# Altium PCB LQ_MOSFET光隔全桥双路驱动.PcbDoc
Units mil, origin at the board's own origin, x right, y up, seen from the top; angles counter-clockwise.
Board outline 2086.61 x 3267.72 mil, 2 copper layers (TopLayer, BottomLayer); 69 components, 48 nets, 195 pads, 0 vias.
Unrouted connection lines stored in the file: 19.
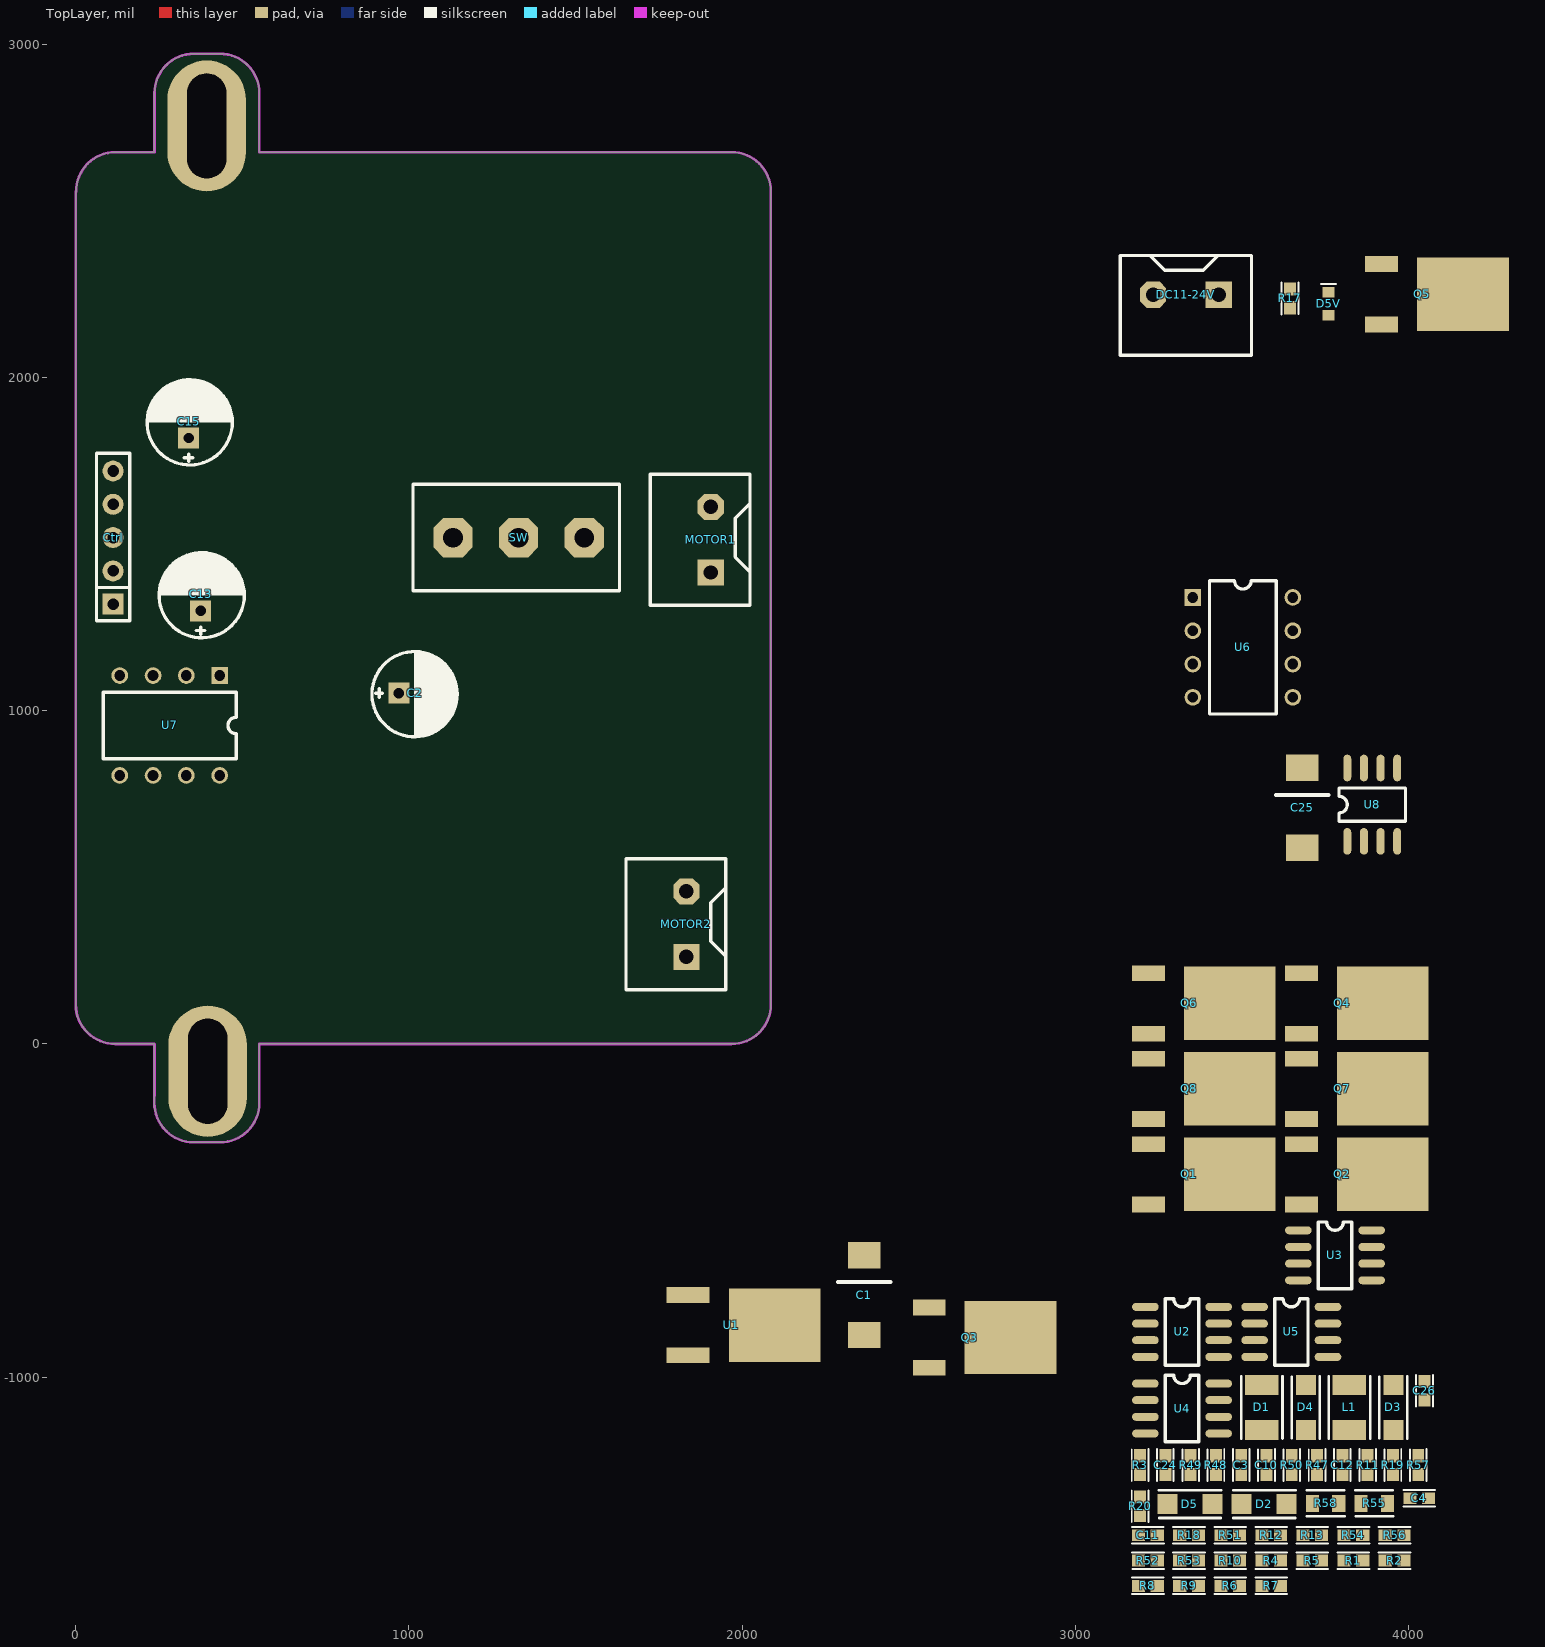
[diagram p0: TopLayer view]
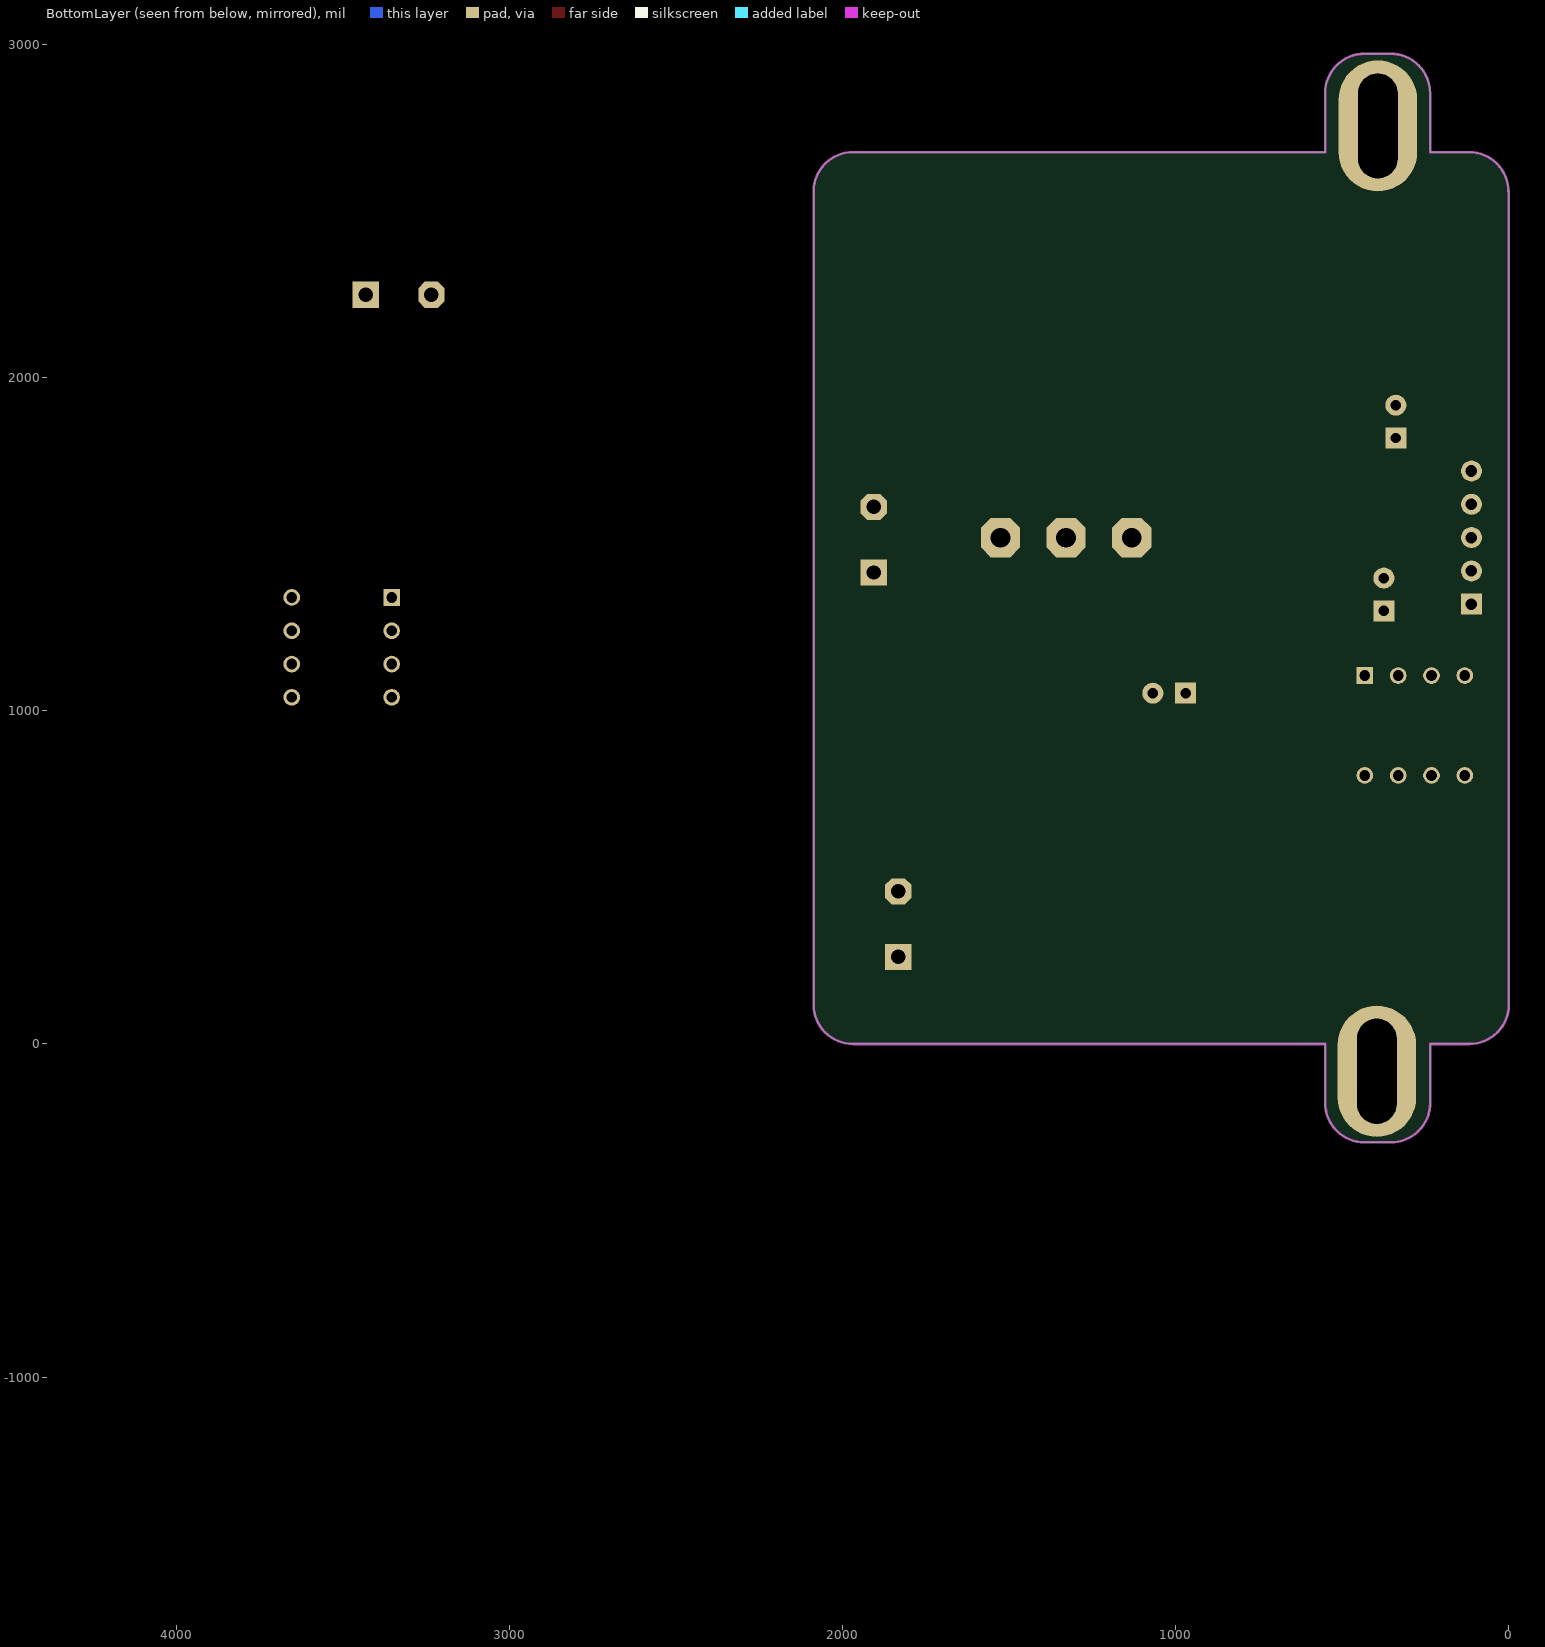
[diagram p1: BottomLayer view, seen from below]

## Layer stack, top to bottom
TopSolder: solder mask 0.4, Solder Resist, Dk 3.5
TopLayer: signal copper 1.4
Dielectric1: dielectric 12.6, FR-4, Dk 4.8
BottomLayer: signal copper 1.4
BottomSolder: solder mask 0.4, Solder Resist, Dk 3.5

## Board outline
118.11,0 236.22,0 236.22,-139.89 235.89,-177.17 ccw(c354,-177.17) 354,-295.28 433,-295.28 ccw(c433,-177.17) 551.11,-177.17 551.18,-139.89 551.18,0 1968.5,-0.11 ccw(c1968.5,118) 2086.61,118 2086.61,2559 ccw(c1968.5,2559) 1968.5,2677.11 551.18,2677.17 551.18,2854.33 ccw(c433.07,2854.33) 433.07,2972.44 354.33,2972.44 ccw(c354.33,2854.33) 236.22,2854.33 236.22,2677.17 119,2677.17 119,2677 ccw(c119,2558.89) 0.89,2558.89 0,2558.89 0,118.11 ccw(c118.11,118.11)

## Design rules (kind name [scope] priority, off if disabled: settings)
Clearance [All] p1: gap=7.87 ignorepadtopadclearanceinfootprint=FALSE except(0: Arc-Hole Track-Hole SMDPad-Hole THPad-Hole Via-Hole Fill-Hole Poly-Hole Region-Hole Text-Hole)
FabricationTestPointUsage TestPointUsage [All] p1: valid=0 allowmultiple=FALSE
FabricationTestpoint Testpoint [All] p1: side=3 testpointundercomponent=TRUE minsize=40 maxsize=100 preferedsize=60 minholesize=20 maxholesize=40 preferedholesize=32 testpointgrid=1 allowsidetop=TRUE allowsidebottom=TRUE usegrid=TRUE gridtolerance=0.01
PlaneConnect [All] p1: planeconnectstyle=Direct reliefexpansion=20 reliefentries=4 reliefconductorwidth=10 reliefairgap=10
PolygonConnect [All] p1: connectstyle=Direct reliefconductorwidth=10 reliefentries=4 polygonreliefangle="90 Angle" airgapwidth=10
RoutingVias [All] p1: holewidth=28 width=50 viastyle="Through Hole" minholewidth=28 minwidth=50 maxholewidth=28 maxwidth=50
SolderMaskExpansion [All] p1: expansion=4 istentingtop=FALSE
Width Width_1 [InNetClass('PWR')] p1: maxlimit=35 minlimit=35 preferedwidth=35 minimp=50.000000 maximp=50.000000 favimp=50.000000
Width [InNetClass('SIGNEL')] p2: maxlimit=20 minlimit=20 preferedwidth=20 minimp=50.000000 maximp=50.000000 favimp=50.000000
27 further rules are at their usual default settings.

## Classes and differential pairs
net class SIGNEL: NetC4_1 NetC4_2 NetC10_1 NetC10_2 NetC11_1 NetC11_2 NetC12_1 NetC12_2 NetC24_1 NetD1_1 NetD5V_1 NetL1_2 NetQ1_1 NetQ2_1 NetQ3_1 NetQ4_1 NetQ5_1 NetQ6_1 NetQ7_1 NetQ8_1 NetR2_1 NetR3_1 NetR4_1 NetR5_1 NetR6_1 NetR7_1 NetR8_1 NetR9_1 NetR47_1 NetR48_1 NetR49_1 NetR54_1 NetR56_2 NetR58_2 P1 P2 P3 P4 PWM1 PWM2 PWM3 PWM4
net class PWR: 12V BAT GND M3V3 VCC5V VCC12V

## Components (designator, comment, footprint, x,y, rotation, side; value= is the part's Value field where it differs from the comment)
C1 "330u" LQ_7343D 2367,-634.03 r90 top
C2 "470u/16V" LQ_220U16V 970,1053 r0 top
C3 "104" LQ_0603 3498.58,-1236.13 r270 top
C4 "105" LQ_0603 4004.81,-1363.76 r0 top
C10 "105" LQ_0603 3574.48,-1292.13 r90 top
C11 "105" LQ_0603 3190.69,-1475.1 r0 top
C12 "105" LQ_0603 3802.2,-1236.13 r270 top
C13 "470u/35V" LQ_220U16V 375,1300 r90 top
C15 "470u/16V" LQ_220U16V 339,1819 r90 top
C24 "220p" LQ_0603 3270.86,-1236.13 r270 top
C25 "470u/16V" LQ_7343D 3681.53,828.87 r90 top
C26 "0.1u" LQ_0603 4048.62,-1069.13 r90 top
Ctrl "CON5" LQ_SIP5 112,1320 r90 top
D1 "1N5189" LQ_1210 3560.35,-1158.44 r90 top
D2 "1N5819" LQ_1206 3634.91,-1381.09 r180 top
D3 "1N5819" LQ_1206 3955.39,-1158.44 r90 top
D4 "1N5819" LQ_1206 3692.56,-1158.44 r90 top
D5 "1N5819" LQ_1206 3411.91,-1381.09 r180 top
D5V "RED" LQ_0603D 3761,2188 r90 top
DC11-24V "LQ_PIN2" LQ_PIN2 3431,2249 r180 top
L1 "120uH" LQ_1210 3823.19,-1158.44 r90 top
MOTOR1 "MOTOR IF" LQ_PIN2 1906,1415.15 r90 top
MOTOR2 "MOTOR IF" LQ_PIN2 1833,261.15 r90 top
Q1 "7843" LQ_DPAK123 3220.21,-300.72 r270 top
Q2 "7843" LQ_DPAK123 3679.31,-300.72 r270 top
Q3 "7843" LQ_DPAK123 2562,-791.28 r270 top
Q4 "7843" LQ_DPAK123 3679.31,211.98 r270 top
Q5 "7843" LQ_DPAK123 3919.91,2341 r270 top
Q6 "7843" LQ_DPAK123 3220.21,211.98 r270 top
Q7 "7843" LQ_DPAK123 3679.31,-44.37 r270 top
Q8 "7843" LQ_DPAK123 3220.21,-44.37 r270 top
R1 "1K" LQ_0603 3807.53,-1551.01 r0 top
R2 "10K" LQ_0603 3930.9,-1551.01 r0 top
R3 "10K" LQ_0603 3194.95,-1292.13 r90 top
R4 "10K" LQ_0603 3560.8,-1551.01 r0 top
R5 "10K" LQ_0603 3684.16,-1551.01 r0 top
R6 "10K" LQ_0603 3437.43,-1626.91 r0 top
R7 "10K" LQ_0603 3616.8,-1626.91 r180 top
R8 "10K" LQ_0603 3190.69,-1626.91 r0 top
R9 "10K" LQ_0603 3314.06,-1626.91 r0 top
R10 "33R" LQ_0603 3437.43,-1551.01 r0 top
R11 "33R" LQ_0603 3878.11,-1236.13 r270 top
R12 "33R" LQ_0603 3616.8,-1475.1 r180 top
R13 "33R" LQ_0603 3684.16,-1475.1 r0 top
R17 "33R" LQ_0603 3645,2266 r270 top
R18 "33R" LQ_0603 3314.06,-1475.1 r0 top
R19 "33R" LQ_0603 3954.01,-1292.13 r90 top
R20 "33R" LQ_0603 3194.95,-1415.5 r90 top
R47 "390" LQ_0603 3726.3,-1292.13 r90 top
R48 "390" LQ_0603 3422.67,-1292.13 r90 top
R49 "390" LQ_0603 3346.77,-1292.13 r90 top
R50 "390" LQ_0603 3650.39,-1292.13 r90 top
R51 "390" LQ_0603 3493.43,-1475.1 r180 top
R52 "390" LQ_0603 3246.69,-1551.01 r180 top
R53 "390" LQ_0603 3314.06,-1551.01 r0 top
R54 "390" LQ_0603 3863.53,-1475.1 r180 top
R55 "0R5" LQ_0805 3858.7,-1379.12 r0 top
R56 "3K8" LQ_0603 3986.9,-1475.1 r180 top
R57 "30K" LQ_0603 4029.92,-1292.13 r90 top
R58 "220" LQ_0805 3712.59,-1379.12 r0 top
SW "SW-SPDT" LQ_SWSIP3 1132.3,1520 r0 top
U1 "LM7805-5V" LQ_DPAK 1838,-753.48 r270 top
U2 "IR2104" SO-8 3211,-789.44 r0 top
U3 "IR2104" SO-8 3670.1,-559.44 r0 top
U4 "IR2104" SO-8 3211,-1019.44 r0 top
U5 "IR2104" SO-8 3539,-789.44 r0 top
U6 "HCPL2630" DIP8 3353.47,1340.43 r0 top
U7 "HCPL2630" DIP8 432,1106 r270 top
U8 "MC34063" SO-8 3816.98,608.24 r90 top

## Footprints (in the part's own frame and the unit in brackets; to place one, negate y for a bottom-side part, rotate by r counter-clockwise, add the part's x,y. Pads: shape width x height; smd on the part's side, far side on the other; paste and mask are expansions set on the pad)
DIP8 [mil]
  rect 50x50 hole 32: 1(0,0)
  round 50 hole 32: 2(0,-100) 3(0,-200) 4(0,-300) 5(300,-300) 6(300,-200) 7(300,-100) 8(300,0)
  silkscreen extent 50,-350 250,50, body extent -56,-369 354,65, height 175
LQ_220U16V [mm]
  rect 1.6x1.6 hole 0.8: 1(0,0)
  round 1.6 hole 0.8: 2(2.5,0)
  silkscreen extent -2.05,-3.33 4.45,3.17
LQ_0603 [mm]
  rect 1x0.9 smd: 1(0,0) 2(1.422,0)
  silkscreen extent -0.5,-0.64 1.92,0.64
LQ_0603D [mm]
  rect 0.8x0.9 smd: 1(0,0) 2(1.727,0)
  silkscreen extent 2.36,-0.56 2.36,0.58
LQ_0805 [mm]
  rect 1x1.3 smd: 1(0,0) 2(2,0)
  silkscreen extent -0.44,-0.97 2.44,1, body extent 0,-0.62 2,0.63, height 0.6
LQ_1206 [mil]
  rect 60x60 smd: 1(0,0) 2(135,0)
  silkscreen extent -27,-41 161,42
LQ_1210 [mil]
  rect 60x100 smd: 1(0,0) 2(135,0)
  silkscreen extent -26,-62 161,61
LQ_7343D [mm]
  rect 2x2.5 smd: 1(0,0) 2(-6.096,0)
  silkscreen extent -2.06,-2 -2.06,2, body extent -6.66,-2.17 0.64,2.13, height 2.8
LQ_DPAK [mm]
  rect 1.2x3.302 smd: 1(0,0) 3(4.6,0)
  rect 5.6x7 smd: 2(2.3,6.604)
LQ_DPAK123 [mm]
  rect 1.2x2.5 smd: 1(0,0) 2(4.6,0)
  rect 5.6x7 smd: 3(2.286,6.2)
LQ_PIN2 [mm]
  rect 2x2 hole 1.1: 1(0,0)
  oct 2x2 hole 1.1: 2(5,0)
  silkscreen extent -2.5,-3 7.5,4.6, body extent -2.81,-2.97 7.79,4.63, height 10
LQ_SIP5 [mm]
  rect 1.6x1.6 hole 0.88: 1(0,0)
  round 1.6 hole 0.88: 2(2.54,0) 3(5.08,0) 4(7.62,0) 5(10.16,0)
  silkscreen extent -1.27,-1.28 11.5,1.27, body extent -1.27,-1.24 11.43,1.25, height 8.54
LQ_SWSIP3 [mm]
  oct 3x3 hole 1.5: 1(0,0) 2(5,0) 3(10,0)
  silkscreen extent -3.05,-4.06 12.7,4.06, body extent -1.47,-5.46 11.53,5.6, height 28.43
SO-8 [mil]
  oval 80x24 smd: 1(0,0) 2(0,-50) 3(0,-100) 4(0,-150) 5(220,-150) 6(220,-100) 7(220,-50) 8(220,0)
  silkscreen extent 60,-175 160,25

## Part data
C1: library part CAPACITOR, "Capacitor"
C2 C13 C15: library part LQ_CAP_POL, "10u"
C3 C24 C26: library part CAP, "Capacitor"
C4 C10 C11 C12: library part LQ_CAP, "CAP"
C25: library part "CAPACITOR POL", "Capacitor"
Ctrl: "Connector"
D1: library part DIODE, "Diode"
D2 D3 D4 D5: library part LQ_DIODE
D5V: library part LQ_LED
DC11-24V: "Jumper"
L1: library part INDUCTOR
MOTOR1 MOTOR2: library part "MOTOR AC"
Q1 Q2 Q3 Q4 Q5 Q6 Q7 Q8: library part BSS138N, "BSS138N"
R1 R47 R48 R49 R50 R51 R52 R53 R54: library part LQ_RES, "RES"
R2 R3 R4 R5 R6 R7 R8 R9 R10 R11 R12 R13 R17 R18 R19 R20: library part LQ_RES, "1K"
R55 R56 R57 R58: library part RES2
U1: library part LM7805
U6 U7: "6N137 2631"

## Free pads (board coordinates)
  oval 236.22x393.7 hole 118.11 slot 314.96 at 90 deg: 0(393,2755.91) 1(396,-82)

## Nets (pads, with @x,y where several pads share a name; then routed paths per layer and width w, separated by ;. In a path a pad name is that pad's centre, name@x,y a point inside that pad or via, vN(x,y) a via of type N, cw(c..) or ccw(c..) an arc to the next point about the centre after c; other vN are vias at no path point)
12V: C15.1 C25.1 C26.1 D1.2 D2.2 D3.2 D4.2 D5.2 R57.1 U2.1 U2.3 U3.1 U3.3 U4.1 U4.3 U5.1 U5.3
BAT: C13.1 Q1.3 Q2.3 Q5.3 Q6.3 SW.2 SW.3 U1.1
GND: C1.2 C2.2 C3.2 C13.2 C15.2 C24.2 C25.2 C26.2 D5V.2 DC11-24V.1 Q3.2 Q4.2 Q7.2 Q8.2 R4.2 R5.2 R8.2 R9.2 R56.1 U1.2 U2.4 U3.4 U4.4 U5.4 U6.5 U7.5 U8.2 U8.4
M3V3: Ctrl.5 R47.2 R48.2 R49.2 R54.2
NetC4_1: C4.1 D2.1 U2.8
NetC4_2: C4.2 MOTOR1.2 Q1.2 Q3.3 R2.2 U2.6
NetC10_1: C10.1 D3.1 U3.8
NetC10_2: C10.2 MOTOR1.1 Q2.2 Q4.3 R3.2 U3.6
NetC11_1: C11.1 D4.1 U4.8
NetC11_2: C11.2 MOTOR2.2 Q5.2 Q7.3 R6.2 U4.6
NetC12_1: C12.1 D5.1 U5.8
NetC12_2: C12.2 MOTOR2.1 Q6.2 Q8.3 R7.2 U5.6
NetC24_1: C24.1 U8.3
NetD1_1: D1.1 L1.1 U8.1
NetD5V_1: D5V.1 R1.2
NetL1_2: L1.2 R55.1 R58.1 U8.7
NetQ1_1: Q1.1 R10.1
NetQ2_1: Q2.1 R11.1
NetQ3_1: Q3.1 R12.1
NetQ4_1: Q4.1 R13.1
NetQ5_1: Q5.1 R17.1
NetQ6_1: Q6.1 R19.1
NetQ7_1: Q7.1 R18.1
NetQ8_1: Q8.1 R20.1
NetR2_1: R2.1 R10.2 U2.7
NetR3_1: R3.1 R11.2 U3.7
NetR4_1: R4.1 R12.2 U2.5
NetR5_1: R5.1 R13.2 U3.5
NetR6_1: R6.1 R17.2 U4.7
NetR7_1: R7.1 R19.2 U5.7
NetR8_1: R8.1 R18.2 U4.5
NetR9_1: R9.1 R20.2 U5.5
NetR47_1: R47.1 U6.1
NetR48_1: R48.1 U6.4
NetR49_1: R49.1 U7.1
NetR54_1: R54.1 U7.4
NetR56_2: R56.2 R57.2 U8.5
NetR58_2: R58.2 U8.8
P1: R50.1 U2.2 U6.7
P2: R52.1 U3.2 U6.6
P3: R51.1 U4.2 U7.7
P4: R53.1 U5.2 U7.6
PWM1: Ctrl.4 U6.2
PWM2: Ctrl.3 U6.3
PWM3: Ctrl.2 U7.2
PWM4: Ctrl.1 U7.3
VCC5V: C1.1 C2.1 C3.1 R1.1 R50.2 R51.2 R52.2 R53.2 R55.2 U1.3 U6.8 U7.8 U8.6
VCC12V: DC11-24V.2 SW.1

## Polygon pours and split planes (outlines as drawn)
no net on TopLayer "NONET_L01_P006" (solid, pour order 6): 54,2646

## Keep-outs
KeepOutLayer:
  lines w7.87: 0,2558.89 0,118.11 ccw(c118.11,118.11) 118.11,0 236.22,0 236.22,-139.89 235.89,-177.17 ccw(c354,-177.17) 354,-295.28 433,-295.28 ccw(c433,-177.17) 551.11,-177.17 551.18,-139.89 551.18,0 1968.5,-0.11 ccw(c1968.5,118) 2086.61,118 2086.61,2559 ccw(c1968.5,2559) 1968.5,2677.11 551.18,2677.17 551.18,2855 ; 0.89,2558.89 cw(c119,2558.89) 119,2677 ; 119,2677.17 236.22,2677.17 236.22,2855 ; 236.22,2854.33 cw(c354.33,2854.33) 354.33,2972.44 433.07,2972.44 cw(c433.07,2854.33) 551.18,2854.33